# EAGLE board projeto_sistemas_embarcados (EAGLE 9.6.2)
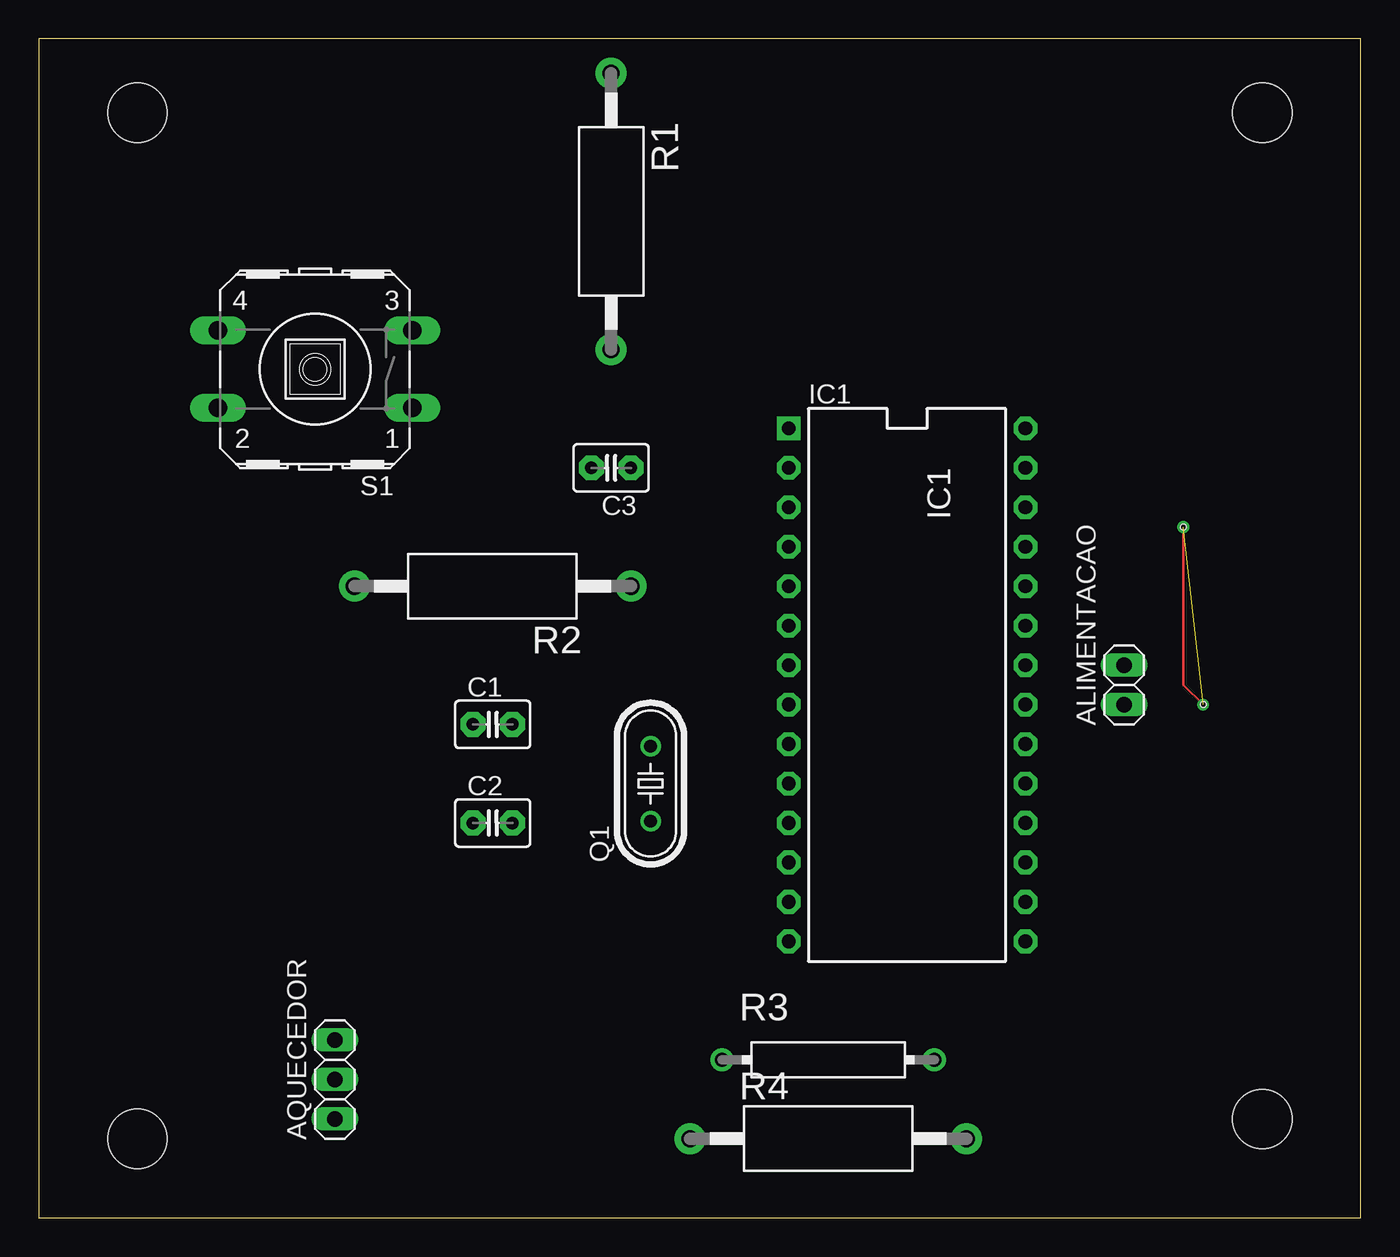
[diagram p0: board, top side]
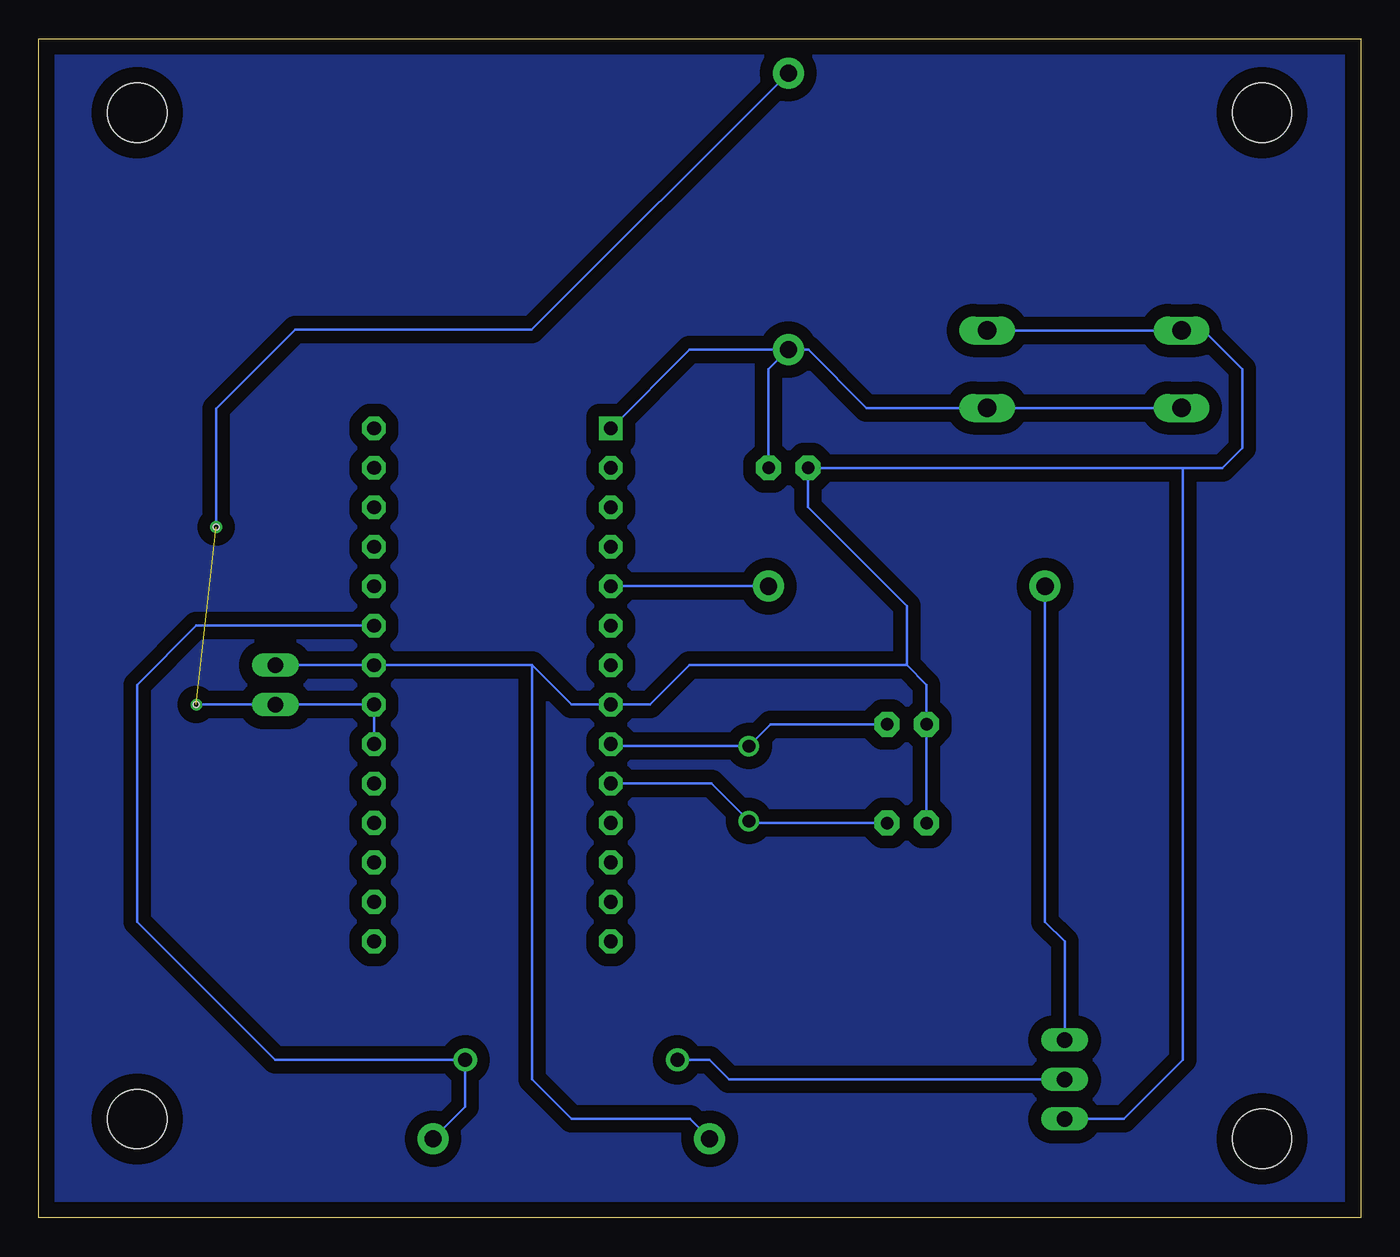
[diagram p1: board, bottom side, seen from below]

Size 85.07 x 75.87 mm. Coordinates in mm from the lower left corner, seen from the top.
Outline: 0,0 85.07,0 85.07,75.87 0,75.87 0,0
Copper layers (1*16): Top 0.035mm / dielectric 1.5mm / Bottom 0.035mm
Design rules "default": minimum track width 6mil, minimum drill 0.35mm, track to track 6mil, track to pad 6mil, pad to pad 6mil, via to via 6mil, smd to smd 6mil, copper to edge 40mil, drill to drill 6mil, minimum pad ring 10mil, minimum via ring 8mil, stop-mask expansion 4mil, vias tented up to drill 0mil, thermal gap 10mil
Holes 0.35 mm at 73.66,44.45 74.93,33.02
Holes 3.81 mm at 6.35,5.08 6.35,71.12 78.74,71.12 78.74,6.35

## Footprints (pad centres in the part's own frame; a part is rotated, then mirrored left to right if it is on the bottom)
1X02 = drill 1.016 long: 1 -1.27,0; 2 1.27,0
1X03 = drill 1.016 long: 1 -2.54,0; 2 0,0; 3 2.54,0
C2.5-3 = drill 0.813 pad 1.6 octagon: 1 -1.27,0; 2 1.27,0
DIL28 = drill 0.889 pad 1.524 square: 1 -16.51,-7.62 | drill 0.889 pad 1.524 octagon: 2 -13.97,-7.62; 3 -11.43,-7.62; 4 -8.89,-7.62; 5 -6.35,-7.62; 6 -3.81,-7.62; 7 -1.27,-7.62; 8 1.27,-7.62; 9 3.81,-7.62; 10 6.35,-7.62; 11 8.89,-7.62; 12 11.43,-7.62; 13 13.97,-7.62; 14 16.51,-7.62; 15 16.51,7.62; 16 13.97,7.62; 17 11.43,7.62; 18 8.89,7.62; 19 6.35,7.62; 20 3.81,7.62; 21 1.27,7.62; 22 -1.27,7.62; 23 -3.81,7.62; 24 -6.35,7.62; 25 -8.89,7.62; 26 -11.43,7.62; 27 -13.97,7.62; 28 -16.51,7.62
HC49/S = drill 0.813: 1 -2.413,0; 2 2.413,0
AC01 = drill 1.1 pad 2: 1 -8.9,0; 2 8.9,0
HPS63 = drill 0.9 pad 1.5: 1 -6.83,0; 2 6.83,0
RACON12 = drill 1.194 long: 1 -6.248,2.489; 2 6.248,2.489; 3 -6.248,-2.489; 4 6.248,-2.489

## Placement (x,y rotation side)
ALIMENTACAO  [1X02]  69.85,34.29 90 top
AQUECEDOR  [1X03]  19.05,8.89 90 top
C1  22pF  [C2.5-3]  29.21,31.75 0 top
C2  22pF  [C2.5-3]  29.21,25.4 0 top
C3  100pF  [C2.5-3]  36.83,48.26 180 top
IC1  [DIL28]  55.88,34.29 270 top
Q1  16MHz  [HC49/S]  39.37,27.94 90 top
R1  10K  [AC01]  36.83,64.77 270 top
R2  1K  [AC01]  29.21,40.64 180 top
R3  990R  [HPS63]  50.8,10.16 0 top
R4  990R  [AC01]  50.8,5.08 0 top
S1  RACON12  [RACON12]  17.78,54.61 180 top

## Library data of the parts
ALIMENTACAO AQUECEDOR = pinhead
C1-C3 = capacitor-wima
IC1 = atmel_tiny24-44-84tiny48-88mega48-88-168-328
Q1 = crystal; OC_FARNELL: 1667008; OC_NEWARK: unknown
R1-R4 = resistor-power; OC_FARNELL: unknown; OC_NEWARK: unknown
S1 = switch-misc

## Nets
GND: ALIMENTACAO.2 AQUECEDOR.1 C1.1 C2.1 C3.2 IC1.8 IC1.22 R4.1 S1.3 S1.4
N$1: AQUECEDOR.3 R2.2
N$2: C1.2 IC1.9 Q1.2
N$3: C2.2 IC1.10 Q1.1
N$4: C3.1 IC1.1 R1.2 S1.1 S1.2
N$5: AQUECEDOR.2 R3.1
N$6: IC1.5 R2.1
N$8: IC1.23 R3.2 R4.2
UCC: IC1.7
VCC: ALIMENTACAO.1 IC1.20 IC1.21 R1.1

## Tracks (layer width: path | path; a pad name or v marks a point on that pad's centre or on a via)
GND
  Bottom 0.152: 29.21,35.56 27.94,34.29 C1.1 C2.1 | 29.21,35.56 43.18,35.56 45.72,33.02 IC1.8 50.8,33.02 53.34,35.56 | 53.34,35.56 IC1.22 ALIMENTACAO.2 | 29.21,35.56 29.21,39.37 35.56,45.72 C3.2 11.43,48.26 | 11.43,48.26 8.89,48.26 7.62,49.53 7.62,54.61 10.11,57.1 S1.4 S1.3 | AQUECEDOR.1 15.24,6.35 11.43,10.16 11.43,48.26 | R4.1 43.17,6.35 50.8,6.35 53.34,8.89 53.34,35.56
N$1
  Bottom 0.152: R2.2 20.31,19.04 19.05,17.78 AQUECEDOR.3
N$2
  Bottom 0.152: IC1.9 48.13,30.35 Q1.2 37.97,31.75 C1.2
N$3
  Bottom 0.152: IC1.10 41.78,27.94 Q1.1 39.24,25.4 C2.2
N$4
  Bottom 0.152: IC1.1 43.19,55.87 R1.2 | R1.2 35.55,55.87 31.8,52.12 24.13,52.12 S1.1 S1.2 | C3.1 38.1,54.61 R1.2
N$5
  Bottom 0.152: R3.1 41.91,10.16 40.64,8.89 AQUECEDOR.2
N$6
  Bottom 0.152: IC1.5 R2.1
N$7  (via drill 0.35)
  other vias: 73.66,44.45
N$8
  Bottom 0.152: R4.2 57.63,7.15 R3.2 69.85,10.16 78.74,19.05 78.74,34.29 74.93,38.1 IC1.23
N$9  (via drill 0.35)
  Top 0.152: v74.93,33.02 73.66,34.29 73.66,44.45
PLANE
  pour Bottom (isolate 0.813, rank 2): 0,76.2 0,0 85.09,0 85.09,76.2
VCC  (1 unrouted)
  Bottom 0.152: IC1.20 IC1.21 ALIMENTACAO.1 74.93,33.02 | R1.1 53.35,57.15 68.58,57.15 73.66,52.07 73.66,44.45